# Allegro board esp8266-iot-pcb.brd
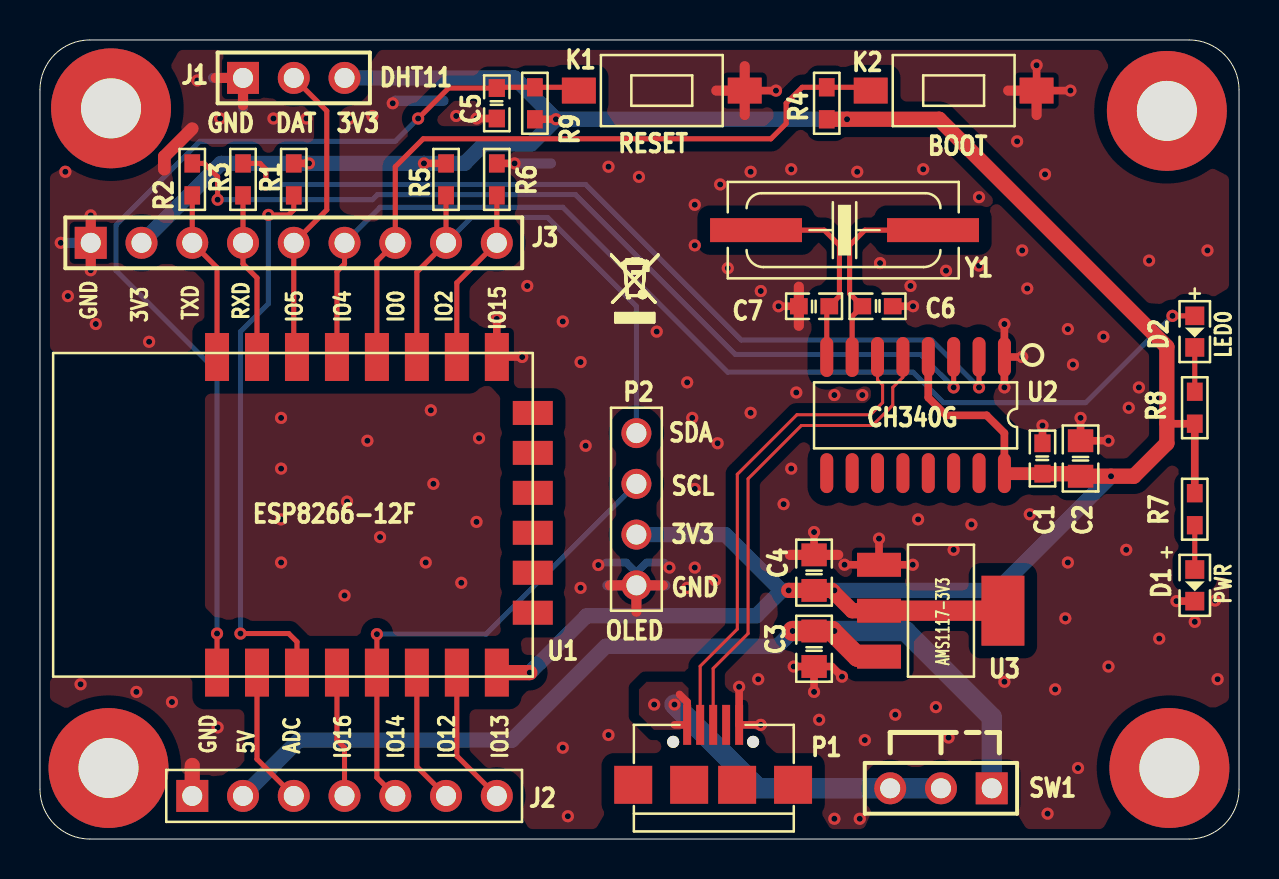
[diagram p0: board, top side]
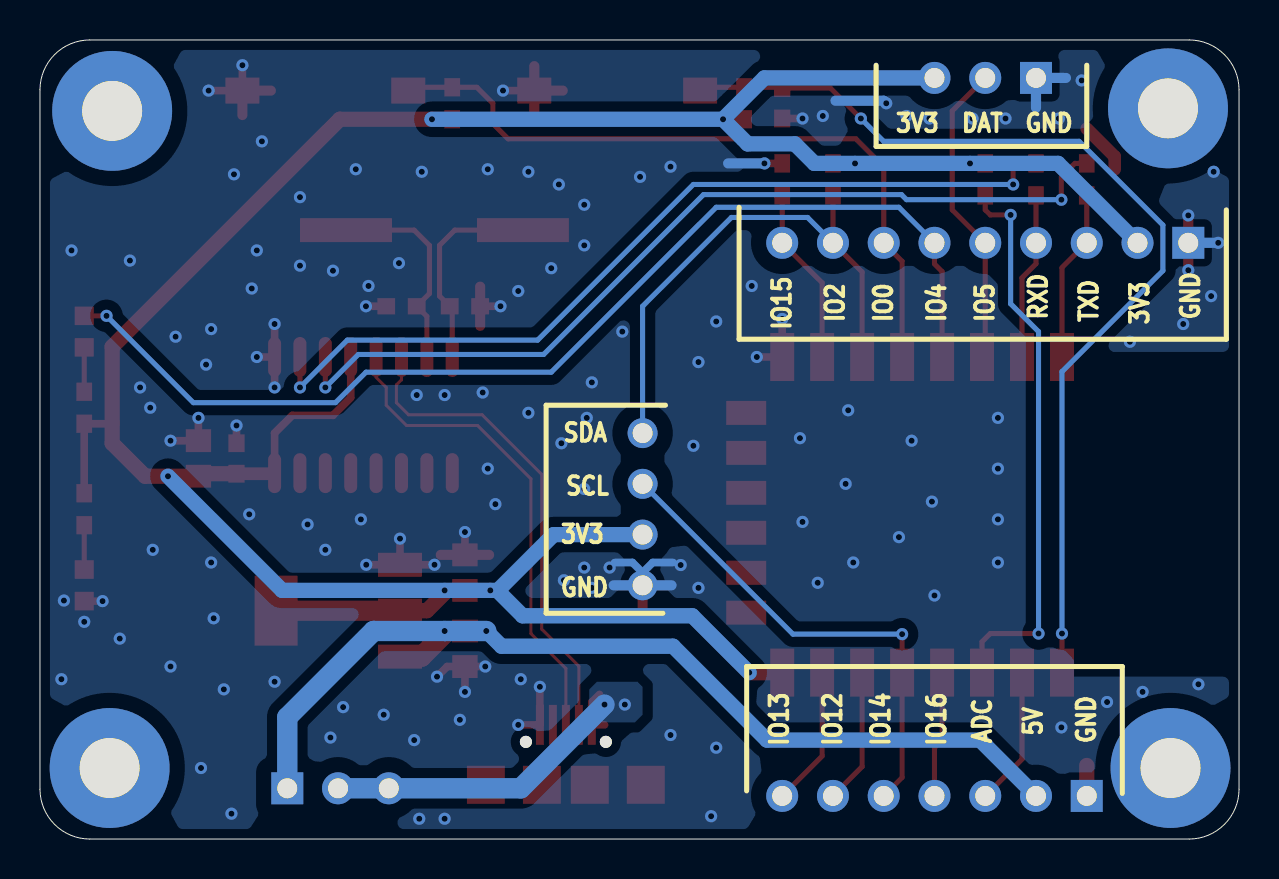
[diagram p1: board, bottom side, seen from below]

Outline 60 x 40 mm; copper layers: TOP, BOTTOM. Coordinates in mm from the lower left corner of the outline.
Outline path: 0,37.5 0,2.5 arc(0.73,0.73) 2.5,0 57.5,0 arc(59.27,0.73) 60,2.5 60,37.5 arc(59.27,39.27) 57.5,40 2.5,40 arc(0.73,39.27) 0,37.5

## Design rules (mm)
constraint set DEFAULT: min track width 0.152
net group POWER: nets 3V3 5V

## Placement (name value [footprint] x y rotation side)
C1  100nF/50V  [C0603]  50.16 19.05 270 top
C2  10uF/10V  [C0805]  52.07 19.05 270 top
C3  10uF/10V  [C0805]  38.73 9.53 270 top
C4  10uF/10V  [C0805]  38.73 13.34 90 top
C5  100nF/50V  [C0603]  22.86 36.83 270 top
C6  22pF/50V  [C0603]  41.91 26.67 180 top
C7  22pF/50V  [C0603]  38.73 26.67 0 top
D1  RED LED  [LED0603]  57.78 12.7 90 top
D2  RED LED  [LED0603]  57.78 25.4 270 top
J1  DHT11 Socket  [SIP-3]  10.16 38.1 0 top
J2  CON7  [SIP-7]  7.62 2.16 0 top
J3  CON9  [SIP-9]  2.54 29.84 0 top
K1  RESET  [BUTTON_2P_SMD]  31.11 37.47 0 top
K2  RESET  [BUTTON_2P_SMD]  45.72 37.47 0 top
NOREF  -  []  29.84 27.69 0 top
NOREF#2  -  [unnamed#2]  3.43 3.56 0 top
NOREF#3  -  [unnamed#2]  3.56 36.58 0 top
NOREF#4  -  [unnamed#2]  56.39 36.45 0 top
NOREF#5  -  [unnamed#2]  56.52 3.56 0 top
P1  Micro-USB  [USB-MICRO-5P]  32.38 5.71 0 top
P2  OLED-0R96  [SIP-4]  29.84 12.7 90 top
R1  10k/1%  [R0603]  12.7 33.02 270 top
R2  300R/1%  [R0603]  7.62 33.02 90 top
R3  300R/1%  [R0603]  10.16 33.02 90 top
R4  10k/1%  [R0603]  39.37 36.83 270 top
R5  10k/1%  [R0603]  20.32 33.02 90 top
R6  10k/1%  [R0603]  22.86 33.02 90 top
R7  1k/1%  [R0603]  57.78 16.51 270 top
R8  1k/1%  [R0603]  57.78 21.59 90 top
R9  10k/1%  [R0603]  24.77 36.83 90 top
SW1  SW-POWER  [SIP-3]  47.62 2.54 180 top
U1  EPS8266-12F  [ESP8266]  22.86 24.13 270 top
U2  CH340G  [SOIC-16]  48.26 24.13 270 top
U3  AMS1117-3V3  [SOT-223]  45.09 11.43 270 top
Y1  12MHz  [CRY_HC_49U_SMD]  40.26 30.48 180 top

## Library data of the parts
C1-C7 = CAP NP
D1 D2 = LED
J1 = CON3
J2 = CON7
J3 = CON9
K1 K2 = BUTTON
P1 = Micro-USB
P2 = OLED-0R96
R1-R9 = R2
SW1 = SW KEY-SPDT_0
U1 = EPS8266-12F
U2 = CH340G
U3 = AMS1117-3V3
Y1 = CRYSTAL

## Footprints (pads in the part's own frame, mm; a bottom-side part is the same pattern mirrored in y, then rotated)
BUTTON_2P_SMD
  rect 1.7x1.3 smd: 1(-4.15,0) 2(4.15,0)
C0603
  rect 0.889x0.813 smd: 1(-0.762,0) 2(0.762,0)
C0805
  rect 1.143x1.27 smd: 1(-0.889,0) 2(0.889,0)
CRY_HC_49U_SMD
  rect 4.6x1.2 smd: 1(-4.428,0) 2(4.428,0)
ESP8266
  rect 2.4x1.2 smd: 1(0,0) 2(0,-2) 3(0,-4) 4(0,-6) 5(0,-8) 6(0,-10) 7(0,-12) 8(0,-14) 9(15.8,-14) 10(15.8,-12) 11(15.8,-10) 12(15.8,-8) 13(15.8,-6) 14(15.8,-4) 15(15.8,-2) 16(15.8,0)
  rect 1.2x2 smd: 17(12.8,1.8) 18(10.8,1.8) 19(8.8,1.8) 20(6.8,1.8) 21(4.8,1.8) 22(2.8,1.8)
LED0603
  rect 0.93x0.95 smd: 1(-0.79,0) 2(0.79,0)
R0603
  rect 0.914x0.787 smd: 1(-0.8,0) 2(0.8,0)
SIP-3
  rect 1.6x1.6 hole 1: 1(0,0)
  round 1.6 hole 1: 2(2.54,0) 3(5.08,0)
SIP-4
  round 1.5 hole 1: 1(0,0) 2(2.54,0) 3(5.08,0) 4(7.62,0)
SIP-7
  rect 1.6x1.6 hole 1: 1(0,0)
  round 1.6 hole 1: 2(2.54,0) 3(5.08,0) 4(7.62,0) 5(10.16,0) 6(12.7,0) 7(15.24,0)
SIP-9
  rect 1.6x1.6 hole 1: 1(0,0)
  round 1.6 hole 1: 2(2.54,0) 3(5.08,0) 4(7.62,0) 5(10.16,0) 6(12.7,0) 7(15.24,0) 8(17.78,0) 9(20.32,0)
SOIC-16
  oval 2x0.65 smd: 1(0,0) 2(0,-1.27) 3(0,-2.54) 4(0,-3.81) 5(0,-5.08) 6(0,-6.35) 7(0,-7.62) 8(0,-8.89) 9(5.813,-8.89) 10(5.813,-7.62) 11(5.813,-6.35) 12(5.813,-5.08) 13(5.813,-3.81) 14(5.813,-2.54) 15(5.813,-1.27) 16(5.813,0)
SOT-223
  rect 1.2x2.2 smd: 1(-2.3,-3.1) 2(0,-3.1) 3(2.3,-3.1)
  rect 3.5x2.15 smd: 4(0,3.1)
unnamed#2
  round 6 hole 3: 1(0,0)
USB-MICRO-5P
  rect 1.9x1.9 smd: (-2.7,-3) (0.1,-3) (2.5,-3) (5.3,-3)
  round 0.6 hole 0.6 unplated: (-0.7,-0.85) (3.3,-0.85)
  rect 0.4x2 smd: 1(0,0) 2(0.65,0) 3(1.3,0) 4(1.95,0) 5(2.6,0)

## Nets
3V3: C1.2 C2.2 C4.1 J1.3 J3.2 P2.2(VCC) R1.1 R4.2 R5.2 R7.1 R8.1 R9.1 U1.16(VCC) U2.4 U2.16 U3.2 U3.4(OUT2)
5V: C3.1 J2.2 SW1.1 U3.3
GND: C1.1 C2.1 C3.2 C4.2 C5.2 C6.1 C7.1 D1.1(CATHODE) J1.1 J2.1 J3.1 K1.2 K2.2 P1.5 P2.1 R6.2 U1.1 U2.1 U3.1
ADC: J2.3 U1.10
CH340_RXD: R2.2 U2.3
CH340_TXD: R3.2 U2.2
ESP_RST: C5.1 K1.1 R9.2 U1.9
ESP_RXD: J3.4 R3.1 U1.7
ESP_TXD: J3.3 R2.1 U1.8
GPIO0/BOOT: J3.7 K2.1 R4.1 U1.4
GPIO2/SDA: J3.8 P2.4 R5.1 U1.3
GPIO4/LED: D2.1(CATHODE) J3.6 U1.5
GPIO5: J1.2 J3.5 U1.6
GPIO12: J2.6 U1.14
GPIO13: J2.7 U1.15
GPIO14/SCL: J2.5 P2.3 U1.13
GPIO15: J3.9 R6.1 U1.2
GPIO16: J2.4 U1.12
USB_D+: P1.3 U2.5
USB_D-: P1.2 U2.6
XI: C6.2 U2.7 Y1.1
XO: C7.2 U2.8(XO) Y1.2
N00537: R1.2 U1.11
N02548: P1.1(VCC) SW1.2 SW1.3(NO)
N03677: D1.2 R7.2
N04064: D2.2 R8.2

Pads without a net: NOREF#2 1; NOREF#3 1; NOREF#4 1; NOREF#5 1; P1 4; U1 17 18 19 20 21 22; U2 9 10 11 12 13 14 15

## Via types
v1: diameter 0.61, hole 0.305, TOP to BOTTOM, 155 vias

## Routing (per net, layer and track width the routed paths; a pad name or vN(x,y) marks a point on that pad's centre or on a via; arc(x,y) is an arc through that point)
3V3: length 155.5
  TOP w0.381: v1(19.22,33.82) R5.2 ; U2.4 44.45,22.1 45.34,21.21 47.37,21.21 48.26,20.32 U2.16 ; R7.1 R8.1 56.43,20.79 56.39,20.83 ; R9.1 v1(25.82,36.03) ; R1.1 v1(13.46,33.82)
  TOP w0.635: C1.2 48.29,18.29 U2.16
  TOP w0.762: R4.2 v1(40.39,36.03) 45,36.03 56.39,24.64 56.39,19.81 54.74,18.16 v1(53.59,18.16) C2.2 51.94,18.29 C1.2 ; v1(37.47,12.45) C4.1 39.62,12.45 40.64,11.43 U3.2 ; U1.16 v1(24.51,8.33)
  TOP w1.016: U3.2 U3.4
  BOTTOM w0.762: 37.12,12.45 37.08,12.45 34.29,15.24 P2.2 ; 37.12,12.45 v1(37.47,12.45) v1(39.75,12.45) 47.88,12.45 v1(53.59,18.16) ; 37.12,12.45 35.85,11.18 27.36,11.18 v1(24.51,8.33) ; J1.3 23.75,38.1 v1(25.82,36.03) ; J3.2 9.06,33.82 v1(13.46,33.82) v1(19.22,33.82) 21.25,33.82 22.23,34.8 24.59,34.8 v1(25.82,36.03) ; v1(25.82,36.03) v1(40.39,36.03)
5V: length 51.1
  TOP w1.016: U3.3 40.91,9.13 39.62,10.41 C3.1 v1(37.67,10.41)
  BOTTOM w0.762: J2.2 12.95,4.95 23.62,4.95 28.32,9.65 36.91,9.65 v1(37.67,10.41)
  BOTTOM w1.016: SW1.1 47.62,6.1 43.31,10.41 v1(39.75,10.41) v1(37.67,10.41)
GND: length 73
  TOP w0.381: C3.2 v1(38.73,7.37) ; C3.2 39.62,8.64 v1(40.13,8.13) ; C3.2 v1(37.72,8.64) ; C1.1 v1(50.16,20.7) ; v1(22.86,26.04) U1.1 v1(24.13,24.13) ; K1.2 v1(36.83,37.47) ; R6.2 v1(23.75,33.82) ; U3.1 v1(41.98,15.04) ; U3.1 v1(40.26,13.73) ; U3.1 v1(43.67,13.73) ; C5.2 v1(21.84,36.07) ; v1(53.47,19.94) C2.1 v1(52.07,21.08) ; U2.1 v1(49.15,24.13) ; U2.1 v1(48.26,22.61) ; U2.1 v1(48.26,25.78) ; C6.1 v1(43.69,26.67) ; C4.2 v1(38.73,15.37) ; C7.1 v1(36.96,26.67) ; v1(36.07,5.71) P1.5 v1(34.98,7.62) ; D1.1 v1(56.87,11.91) ; v1(51.56,37.47) K2.2 v1(49.87,38.73)
  TOP w0.508: 37.97,25.69 C7.1 37.97,27.65 ; v1(2.54,28.47) J3.1 v1(2.54,31.22) ; 33.84,37.47 K1.2 ; K1.2 35.27,36.24 ; K1.2 35.27,38.69 ; 29.84,11.38 P2.1 ; P2.1 31.17,12.7 ; P2.1 28.52,12.7 ; 49.87,36.24 K2.2 48.45,37.47 ; 10.16,36.73 J1.1 8.79,38.1 ; 39.94,14.22 C4.2 37.53,14.22
  TOP w0.635: 7.62,35.56 6.22,34.16 6.22,33.53
  TOP w0.762: J2.1 7.62,3.68
  BOTTOM w0.381: 28.32,13.84 29.34,13.84 29.84,13.34 ; 29.84,13.34 P2.1 ; 29.84,13.34 30.35,13.84 31.24,13.84
  BOTTOM w0.508: 10.16,36.6 J1.1 8.66,38.1 ; 31.29,12.7 P2.1 28.4,12.7 ; v1(1.04,29.84) J3.1 ; v1(17.65,36.83) 17.78,36.96 20.19,36.96 ; v1(23.75,33.82) 25.57,33.82
  vias: v1(1.27,33.4) v1(1.4,27.18) v1(2.03,7.75) v1(2.79,25.78) v1(4.83,7.37) v1(5.46,24.89) v1(6.6,6.86) v1(7.87,37.97) v1(8.89,5.59) v1(9.02,36.07) v1(11.68,36.07) v1(12.06,21.08) v1(12.06,18.54) v1(12.06,16) v1(12.06,13.84) v1(13.34,36.07) v1(15.24,12.19) v1(15.37,16.89) v1(15.49,36.07) v1(16.38,19.94) v1(16.64,36.2) v1(17.02,15.11) v1(19.3,13.84) v1(19.56,21.46) v1(19.68,17.78) v1(20.83,36.2) v1(21.08,12.83) v1(21.84,15.88) v1(21.97,20.07) v1(24.38,27.69) v1(26.16,25.91) v1(26.16,4.57) v1(26.42,1.14) v1(27.05,23.88) v1(27.05,12.57) v1(27.3,19.68) v1(27.94,13.72) v1(28.45,33.66) v1(28.45,5.21) v1(29.97,33.15) v1(30.86,25.4) v1(31.5,13.59) v1(32.38,22.86) v1(32.38,12.57) v1(32.64,21.08) v1(32.77,31.75) v1(32.77,29.72) v1(32.77,17.53) v1(32.77,13.59) v1(33.78,12.95) v1(33.91,19.81) v1(34.04,32.77) v1(34.42,28.57) v1(35.56,33.4) v1(35.56,21.34) v1(35.94,8) v1(36.07,27.43) v1(37.21,16.76) v1(37.59,33.53) v1(37.59,18.54) v1(37.85,22.35) v1(38.99,5.97) v1(39.75,22.23) v1(39.75,1.02) v1(40.89,33.4) v1(41.02,1.02) v1(41.15,22.23) v1(41.27,4.95) v1(42.04,28.83) v1(42.8,6.22) v1(43.56,27.69) v1(43.94,16) v1(44.2,33.53) v1(44.83,6.6) v1(45.34,28.45) v1(45.47,5.08) v1(45.72,14.48) v1(46.61,15.75) v1(46.99,32.13) v1(46.99,28.7) v1(48.26,7.87) v1(48.9,34.92) v1(49.15,29.46) v1(49.4,27.56) v1(49.53,16.26) v1(50.29,33.27) v1(50.42,1.27) v1(50.8,7.49) v1(51.31,11.05) v1(51.44,25.53) v1(51.44,13.84) v1(51.69,23.75) v1(51.94,3.56) v1(53.21,25.15) v1(53.47,8.64) v1(54.36,14.48) v1(54.48,21.59) v1(54.99,22.61) v1(55.5,28.96) v1(56.01,10.03) v1(57.78,10.87) v1(58.42,29.46) v1(58.8,11.94) v1(58.93,8)
ADC: length 6.9
  TOP w0.254: J2.3 10.86,4 U1.10
CH340_RXD: length 45.1
  TOP w0.254: v1(8.89,32) 8.89,33.15 8.22,33.82 R2.2 ; U2.3 v1(45.72,22.61)
  BOTTOM w0.254: v1(45.72,22.61) 44.07,24.26 34.8,24.26 26.8,32.26 16.89,32.26 16.64,32 v1(8.89,32)
CH340_TXD: length 43.4
  TOP w0.254: v1(11.3,32.77) 11.3,33.53 11.01,33.82 R3.2 ; U2.2 v1(46.99,22.61)
  BOTTOM w0.254: v1(46.99,22.61) 44.62,24.98 35.1,24.98 27.3,32.77 v1(11.3,32.77)
ESP_RST: length 50.6
  TOP w0.254: K1.1 26.8,37.63 R9.2 22.9,37.63 C5.1 20.45,37.59 v1(18.92,36.07) ; U1.9 v1(8.86,10.29)
  BOTTOM w0.254: v1(8.86,10.29) 8.86,23.4 3.81,28.45 3.81,30.73 8,34.92 17.78,34.92 v1(18.92,36.07)
ESP_RXD: length 8.4
  TOP w0.254: U1.7 10.86,28.09 10.16,28.79 J3.4 R3.1
ESP_TXD: length 8.6
  TOP w0.254: U1.8 8.86,28.6 J3.3 R2.1
GPIO0/BOOT: length 36
  TOP w0.254: U1.4 16.86,28.93 J3.7 17.78,33.66 19.18,35.05 36.58,35.05 37.34,35.81 37.34,36.83 38.14,37.63 R4.1 41.4,37.63 K2.1
GPIO2/SDA: length 26.9
  TOP w0.254: R5.1 J3.8 18.86,28.39 U1.3
  BOTTOM w0.254: P2.4 29.84,26.67 25.4,31.11 21.59,31.11 J3.8
GPIO4/LED: length 55
  TOP w0.254: J3.6 15.24,28.79 14.86,28.41 U1.5 ; D2.1 v1(56.67,26.19)
  BOTTOM w0.254: J3.6 17.02,31.62 26.16,31.62 34.42,23.37 43.69,23.37 45.21,21.84 52.32,21.84 v1(56.67,26.19)
GPIO5: length 15.4
  TOP w0.254: J1.2 14.35,36.45 14.35,31.5 J3.5 12.7,24.29 U1.6
GPIO12: length 6.8
  TOP w0.254: U1.14 18.86,3.62 J2.6
GPIO13: length 7
  TOP w0.254: U1.15 20.86,4.16 J2.7
GPIO14/SCL: length 24.6
  TOP w0.254: J2.5 16.86,3.08 U1.13 v1(16.86,10.26)
  BOTTOM w0.254: v1(16.86,10.26) 22.32,10.26 P2.3
GPIO15: length 8.9
  TOP w0.254: R6.1 J3.9 20.86,27.85 U1.2
GPIO16: length 6.3
  TOP w0.254: J2.4 15.24,4.57 14.86,4.95 U1.12
USB_D+: length 24.4
  TOP w0.152: P1.3 33.68,8.54 35.43,10.29 35.43,18.03 38.1,20.7 41.66,20.7 42.67,21.72 42.67,22.61 43.18,23.11 U2.5
USB_D-: length 24.5
  TOP w0.152: P1.2 33.03,8.65 34.89,10.51 34.89,18.26 37.88,21.24 41.56,21.24 42.16,21.84 42.16,22.73 41.91,22.99 U2.6
XI: length 10.9
  TOP w0.254: U2.7 40.64,26.16 C6.2 40.51,27.3 40.51,29.72 41.27,30.48 Y1.1 45.07,30.48
XO: length 10.3
  TOP w0.254: U2.8 39.37,26.54 C7.2 40.01,27.18 40.01,29.72 39.24,30.48 Y1.2
N00537: length 28.2
  TOP w0.254: R1.2 12.7,31.5 12.45,31.24 v1(11.43,31.24) ; v1(10.03,10.29) 12.45,10.29 12.86,9.87 U1.11
  BOTTOM w0.254: v1(11.43,31.24) 11.43,26.8 10.03,25.4 v1(10.03,10.29)
N02548: length 17.4
  TOP w0.381: 31.75,5.71 P1.1 32.38,6.86 32,7.24
  BOTTOM w1.016: v1(31.75,6.73) 35.94,2.54 SW1.3 SW1.2
  vias: v1(30.73,6.73)
N03677: length 2.2
  TOP w0.254: D1.2 R7.2
N04064: length 2.2
  TOP w0.254: R8.2 D2.2

## Copper pours and planes (outline as drawn; the poured copper is in the pictures)
GND on TOP: 0.5,37.5 1.09,38.91 2.5,39.5 57.5,39.5 58.91,38.91 59.5,37.5 59.5,2.5 58.91,1.09 57.5,0.5 2.5,0.5 1.09,1.09 0.5,2.5 0.5,8.13 8.26,8.13 8.26,24.38 0.5,24.38 ; 12 cut-outs
GND on BOTTOM: 0.5,37.5 1.09,38.91 2.5,39.5 57.5,39.5 58.91,38.91 59.5,37.5 59.5,2.5 58.91,1.09 57.5,0.5 2.5,0.5 1.09,1.09 0.5,2.5 0.5,8.13 8.26,8.13 8.26,24.38 0.5,24.38 ; 2 cut-outs
N02548 on TOP: 32.64,5.46 32.64,7.37 32.13,7.87 30.35,7.87 29.97,7.49 29.97,6.22 30.73,5.46
N02548 on BOTTOM: 30.1,7.87 32.13,7.87 32.51,7.49 32.51,6.22 32.13,5.84 30.23,5.84 29.84,6.22 29.84,7.62

## Text on the board
Ref Des/Silkscreen Bottom: GND | DAT | 3V3 | SCL | SDA | TXD | RXD | 5V | IO5 | ADC | IO4 | IO16 | IO0 | IO14 | IO2 | IO12 | IO15 | IO13
Ref Des/Silkscreen Top: AMS1117-3V3 | GND | 3V3 | TXD | RXD | 5V | ADC | IO5 | IO4 | IO16 | IO0 | IO14 | IO2 | IO12 | IO15 | IO13 | LED0 | PWR | ESP8266-12F | DAT | DHT11 | OLED | RESET | SDA | SCL | CH340G | BOOT
User.7: FIGURE | FINISHED_SIZE | 12.0 | 39.37 | 118.11 | 23.62 | DRILL CHART: TOP to BOTTOM | ALL UNITS ARE IN MILS | PLATED | NON-PLATED | QTY | 150 | 4 | 22 | 2
